# Altium PCB Generic_Axis_Channel_Blade.PcbDoc (part 2 of 3)
Units mm, origin at the board's own origin, x right, y up, seen from the top; angles counter-clockwise.
Board outline 87.5 x 97.62 mm, 4 copper layers (Top Layer 1, L2_GND, L3_PWR, Bottom Layer 1), stack 1.556 mm thick; 166 components, 595 nets, 662 pads, 1674 vias.
Unrouted connection lines stored in the file: 33.
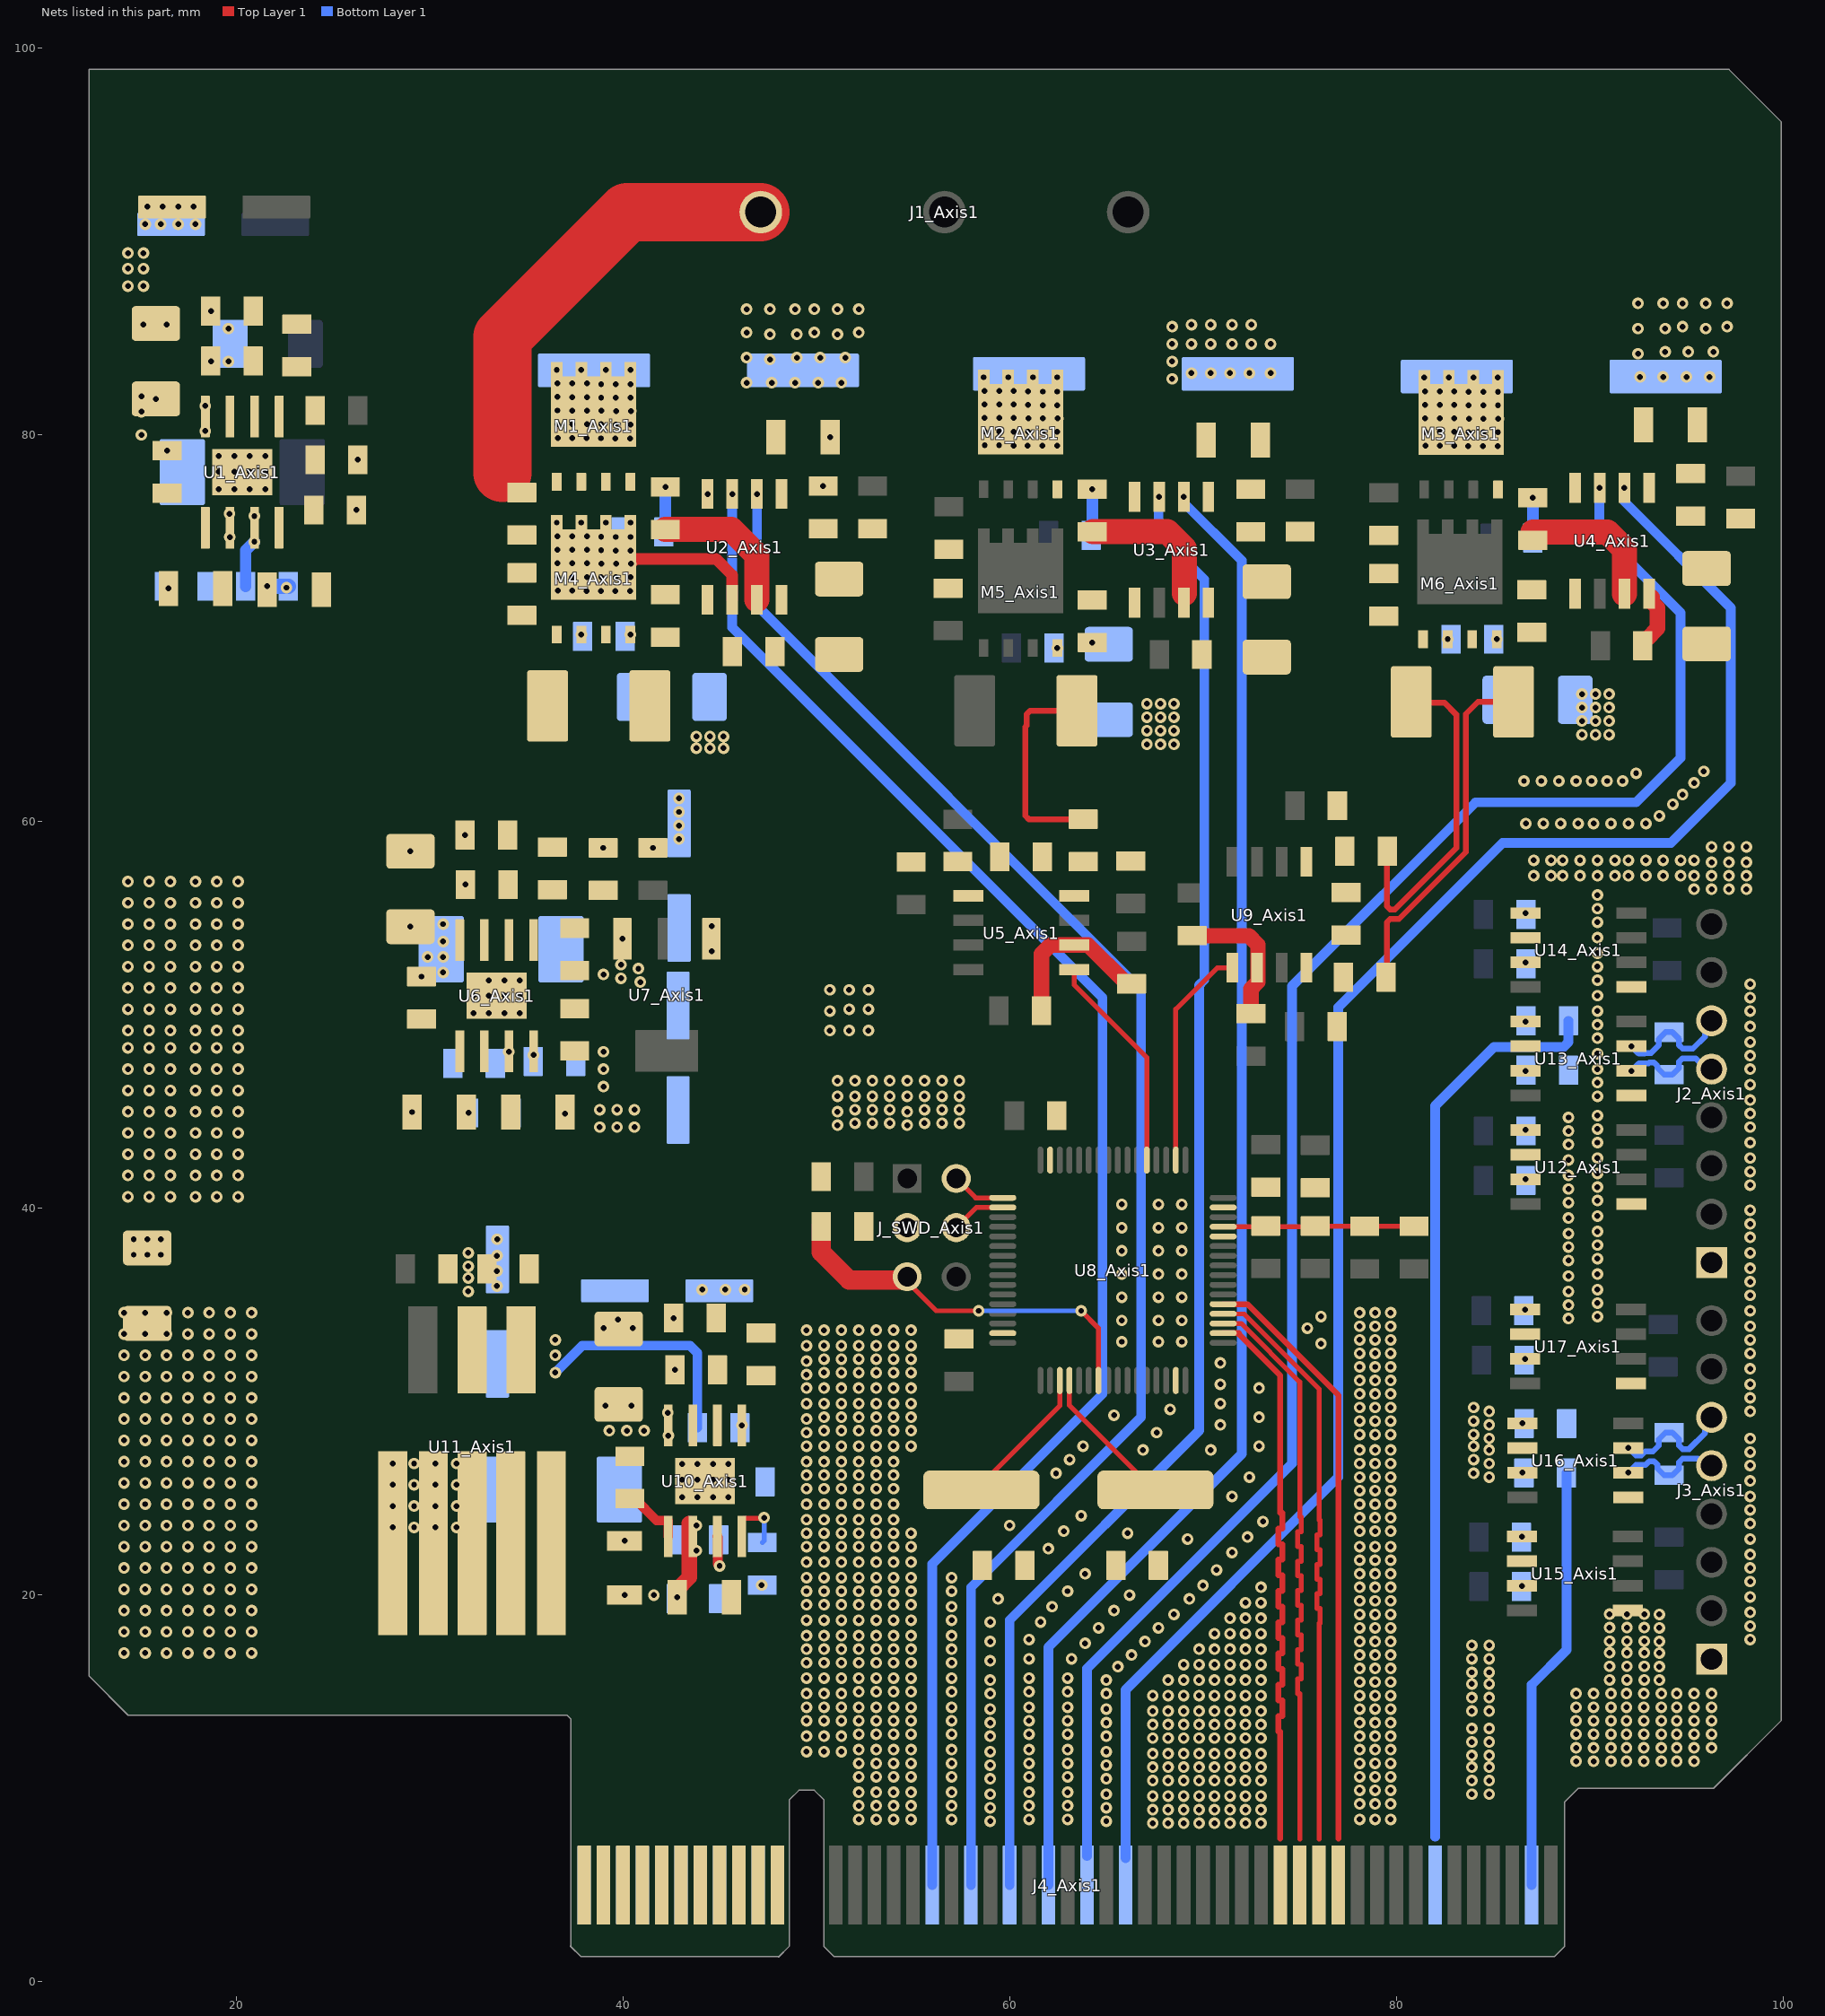
[diagram p4: the nets of this part, all layers, seen from the top]

## Via types
v1: diameter 0.6/0.6 (per signal layer), hole 0.3, Top Layer 1 to Bottom Layer 1, 1674 vias

## Nets (pads, with @x,y where several pads share a name; then routed paths per layer and width w, separated by ;. In a path a pad name is that pad's centre, name@x,y a point inside that pad or via, vN(x,y) a via of type N, cw(c..) or ccw(c..) an arc to the next point about the centre after c; other vN are vias at no path point) (continued)
"AMP1 IN_Axis1_P": C1_Axis1.2 C2_Axis1.2 C3_Axis1.2 C4_Axis1.2 C5_Axis1.2 C6_Axis1.2 C8_Axis1.1 C9_Axis1.1 C10_Axis1.2 C14_Axis1.2 C18_Axis1.2 C19_Axis1.2 C32_Axis1.1 C33_Axis1.1 C34_Axis1.2 C35_Axis1.2 C36_Axis1.1 C37_Axis1.1 C38_Axis1.2 C39_Axis1.2 C48_Axis1.1 C49_Axis1.1 C50_Axis1.2 C51_Axis1.2 C52_Axis1.1 C53_Axis1.1 C54_Axis1.2 C55_Axis1.2 C_BULK1_Axis1.2 C_BULK2_Axis1.2 C_BULK3_Axis1.2 D1_Axis1.1 D2_Axis1.1 D3_Axis1.1 D4_Axis1.1 D5_Axis1.1 D6_Axis1.1 D7_Axis1.1 D8_Axis1.1 J4_Axis1.B1 J4_Axis1.B2 J4_Axis1.B3 J4_Axis1.B4 J4_Axis1.B5 J4_Axis1.B6 J4_Axis1.B7 J4_Axis1.B8 J4_Axis1.B9 J4_Axis1.B10 J4_Axis1.B11 R15_Axis1.1 R16_Axis1.1 R18_Axis1.1 R22_Axis1.1 R23_Axis1.1 R24_Axis1.1 R25_Axis1.1 R30_Axis1.1 R31_Axis1.1 R33_Axis1.1 R34_Axis1.1 R38_Axis1.1 R39_Axis1.1 R41_Axis1.1 U1_Axis1.7 U1_Axis1.9 U2_Axis1.4 U3_Axis1.4 U4_Axis1.4 U6_Axis1.7 U6_Axis1.9 U7_Axis1.1 U10_Axis1.7 U10_Axis1.9 U11_Axis1.2 U11_Axis1.4 | length 29.3
  Top Layer 1 w0.3: R23_Axis1.1@63.484,65.734 61.642,65.734 61.056,65.734 60.88,65.558 60.88,64.972 60.814,64.906 60.814,60.303 60.99,60.128 63.805,60.128 R25_Axis1.1@63.807,60.129 ; R34_Axis1.1@79.468,51.956 79.503,51.991 79.503,54.787 79.679,54.962 80.134,54.962 83.6,58.428 83.6,65.568 84.222,66.19 R24_Axis1.1@86.065,66.19
  other v1: 47.174,20.512 40.086,22.799 28.1,23.5 29.2,23.5 30.3,23.5 31.4,23.5 28.1,24.6 29.2,24.6 30.3,24.6 31.4,24.6 43.059,25.068 43.859,25.068 44.659,25.068 45.459,25.068 28.1,25.7 29.2,25.7 30.3,25.7 31.4,25.7 43.059,25.968 43.859,25.968 44.659,25.968 45.459,25.968 43.059,26.768 43.859,26.768 44.659,26.768 45.459,26.768 28.1,26.8 29.2,26.8 30.3,26.8 31.4,26.8 42.686,31.648 39,33.8 40.5,33.8 39.742,34.254 42.617,34.326 32,35.7 44.1,35.8 45.3,35.8 46.3,35.8 33.484,35.982 32,36.4 33.484,36.764 32,37 33.484,37.546 14.7,37.6 15.4,37.6 16.1,37.6 32,37.7 14.7,38.4 15.4,38.4 16.1,38.4 33.5,38.4 14.4,40.6 15.5,40.6 16.6,40.6 17.9,40.6 19,40.6 20.1,40.6 14.4,41.7 15.5,41.7 16.6,41.7 17.9,41.7 19,41.7 20.1,41.7 14.4,42.8 15.5,42.8 16.6,42.8 17.9,42.8 19,42.8 20.1,42.8 14.4,43.9 15.5,43.9 16.6,43.9 17.9,43.9 19,43.9 20.1,43.9 38.8,44.2 39.7,44.2 40.6,44.2 37,44.9 29.095,44.979 14.4,45 15.5,45 16.6,45 17.9,45 19,45 20.1,45 38.8,45.1 39.7,45.1 40.6,45.1 14.4,46.1 15.5,46.1 16.6,46.1 17.9,46.1 19,46.1 20.1,46.1 39,46.3 14.4,47.2 15.5,47.2 16.6,47.2 17.9,47.2 19,47.2 20.1,47.2 39,47.2 39,48.1 14.4,48.3 15.5,48.3 16.6,48.3 17.9,48.3 19,48.3 20.1,48.3 14.4,49.2 15.5,49.2 16.6,49.2 17.9,49.2 19,49.2 20.1,49.2 50.7,49.2 51.7,49.2 52.7,49.2 32.272,50.097 33.072,50.097 33.872,50.097 34.672,50.097 50.7,50.2 14.4,50.3 15.5,50.3 16.6,50.3 17.9,50.3 19,50.3 20.1,50.3 51.7,50.3 52.7,50.3 32.272,50.997 33.072,50.997 33.872,50.997 34.672,50.997 50.7,51.3 51.7,51.3 52.7,51.3 14.4,51.4 15.5,51.4 16.6,51.4 17.9,51.4 19,51.4 20.1,51.4 33.072,51.797 33.872,51.797 34.672,51.797 14.4,52.5 15.5,52.5 16.6,52.5 17.9,52.5 19,52.5 20.1,52.5 44.6,53.3 14.4,53.6 15.5,53.6 16.6,53.6 17.9,53.6 19,53.6 20.1,53.6 44.6,54.6 14.4,54.7 15.5,54.7 16.6,54.7 17.9,54.7 19,54.7 20.1,54.7 14.4,55.8 15.5,55.8 16.6,55.8 17.9,55.8 19,55.8 20.1,55.8 31.852,56.743 14.4,56.9 15.5,56.9 16.6,56.9 17.9,56.9 19,56.9 20.1,56.9 29.009,58.466 38.982,58.644 41.55,58.644 42.9,59.1 31.84,59.309 42.9,59.8 42.9,60.5 42.9,61.2 43.8,63.8 44.5,63.8 45.2,63.8 67.1,64 67.8,64 68.5,64 43.8,64.4 44.5,64.4 45.2,64.4 89.6,64.5 90.3,64.5 91,64.5 67.1,64.7 67.8,64.7 68.5,64.7 89.6,65.2 90.3,65.2 91,65.2 67.1,65.4 67.8,65.4 68.5,65.4 89.6,65.9 90.3,65.9 91,65.9 67.1,66.1 67.8,66.1 68.5,66.1 89.6,66.6 90.3,66.6 91,66.6 16.503,72.058 26.224,76.117 44.377,76.947 19.1,77.2 19.9,77.2 20.7,77.2 21.5,77.2 50.357,77.349 19.1,78.1 19.9,78.1 20.7,78.1 21.5,78.1 26.284,78.714 19.1,78.9 19.9,78.9 20.7,78.9 21.5,78.9 50.72,79.882 46.4,82.7 47.7,82.7 48.9,82.7 50.1,82.7 51.3,82.7 68.4,82.9 92.6,83 93.8,83 95,83 96.2,83 69.4,83.2 70.4,83.2 71.4,83.2 72.4,83.2 73.5,83.2 18.7,83.8 19.6,83.8 68.4,83.8 47.6,83.9 46.4,84 49,84 50.2,84 51.5,84 92.5,84.2 93.9,84.3 95.1,84.3 96.4,84.3 68.4,84.7 69.4,84.7 70.4,84.7 71.5,84.7 72.5,84.7 73.5,84.7 47.6,85.2 49,85.2 51.1,85.2 46.4,85.3 49.9,85.3 52.2,85.3 19.6,85.5 92.5,85.5 93.9,85.5 96,85.5 68.4,85.6 94.8,85.6 97.1,85.6 15.2,85.7 16.4,85.7 69.4,85.7 70.4,85.7 71.5,85.7 72.5,85.7 18.7,86.4 46.4,86.5 47.6,86.5 48.9,86.5 49.9,86.5 51.1,86.5 52.2,86.5 92.5,86.8 93.8,86.8 94.8,86.8 96,86.8 97.1,86.8 14.4,87.7 15.2,87.7 14.4,88.6 15.2,88.6 14.4,89.4 15.2,89.4 15.3,90.9 16.1,90.9 17,90.9 17.9,90.9 15.4,91.8 16.2,91.8 17,91.8 17.8,91.8
"AMP1 IN_Axis2_N": 
"AMP1 IN_Axis3_N": 
"AMP1 IN_Axis4_N": 
"AMP1 IN_Axis5_N": 
"AMP1 IN_Axis6_N": 
"AMP2 IN_Axis1_N": M6_Axis1.1 M6_Axis1.2 M6_Axis1.3 R14_Axis1.1 R21_Axis1.1 R24_Axis1.2 R35_Axis1.1 | length 17.5
  Top Layer 1 w0.3: R35_Axis1.1@79.538,58.468 79.503,58.433 79.503,55.638 79.679,55.462 79.927,55.462 83.1,58.635 83.1,65.539 82.48,66.159 R24_Axis1.2@80.637,66.159
  other v1: 82.654,69.435
"AMP2 IN_Axis2_N": 
"AMP2 IN_Axis3_N": 
"AMP2 IN_Axis4_N": 
"AMP2 IN_Axis5_N": 
"AMP2 IN_Axis6_N": 
B1_Axis1: C57_Axis1.2 J4_Axis1.A43 R43_Axis1.2 | length 47.2
  Bottom Layer 1 w0.5: 82,7.5 82,45.3 85.046,48.346 88.65,48.346 88.9,48.596 R43_Axis1.2@88.9,49.7
B1_Axis1_N: J2_Axis1.6 R49_Axis1.2 U13_Axis1.7 | length 6.4
  Bottom Layer 1 w0.3: v1(92.154,48.385) 92.541,47.997 92.827,47.997 92.869,48.039 93.18,48.039 93.576,48.435 93.576,48.759 93.926,49.109 R49_Axis1.2@94.1,49.109 94.274,49.109 94.624,48.759 94.624,48.435 94.8,48.259 95.341,48.259 95.957,48.875 95.957,49.004 96.3,49.347 J2_Axis1.6@96.3,49.699
B1_Axis1_P: J2_Axis1.5 R49_Axis1.1 U13_Axis1.6 | length 5.4
  Bottom Layer 1 w0.3: v1(92.154,47.11) 92.541,47.497 93.034,47.497 93.076,47.539 93.324,47.539 93.5,47.364 93.5,47.259 93.85,46.909 R49_Axis1.1@94.1,46.909 94.274,46.909 94.624,47.259 94.624,47.584 94.8,47.759 95.474,47.759 96.034,47.199 J2_Axis1.5@96.3,47.199
B1_Axis2: 
B1_Axis2_N: 
B1_Axis2_P: 
B1_Axis3: 
B1_Axis3_N: 
B1_Axis3_P: 
B1_Axis4: 
B1_Axis4_N: 
B1_Axis4_P: 
B1_Axis5: 
B1_Axis5_N: 
B1_Axis5_P: 
B1_Axis6: 
B1_Axis6_N: 
B1_Axis6_P: 
B2_Axis1: C60_Axis1.2 J4_Axis1.A48 R46_Axis1.2 | length 22.1
  Bottom Layer 1 w0.5: J4_Axis1.A48@87,5 87,15.359 88.8,17.159 C60_Axis1.2@88.8,26.317
B2_Axis1_N: J3_Axis1.6 R52_Axis1.2 U16_Axis1.7 | length 6.6
  Bottom Layer 1 w0.3: v1(91.995,27.609) 92.382,27.221 92.668,27.221 92.869,27.422 93.272,27.422 93.576,27.726 93.576,28.05 93.926,28.4 R52_Axis1.2@94.1,28.4 94.274,28.4 94.624,28.05 94.624,27.726 94.8,27.55 95.14,27.55 95.957,28.367 95.957,28.496 96.3,28.84 J3_Axis1.6@96.3,29.191
B2_Axis1_P: J3_Axis1.5 R52_Axis1.1 U16_Axis1.6 | length 5.7
  Bottom Layer 1 w0.3: v1(91.995,26.334) 92.382,26.721 92.875,26.721 93.076,26.922 93.324,26.922 93.5,26.746 93.5,26.55 93.85,26.2 R52_Axis1.1@94.1,26.2 94.274,26.2 94.624,26.55 94.624,26.874 94.8,27.05 95.59,27.05 95.948,26.691 J3_Axis1.5@96.3,26.691
B2_Axis2: 
B2_Axis2_N: 
B2_Axis2_P: 
B2_Axis3: 
B2_Axis3_N: 
B2_Axis3_P: 
B2_Axis4: 
B2_Axis4_N: 
B2_Axis4_P: 
B2_Axis5: 
B2_Axis5_N: 
B2_Axis5_P: 
B2_Axis6: 
B2_Axis6_N: 
B2_Axis6_P: 
CS_Axis1: J4_Axis1.B35 U8_Axis1.18 | length 30.8
  Top Layer 1 w0.3: U8_Axis1.18@71.043,33.545 71.855,33.545 71.855,33.491 74,31.346 74,24.4 74,24.25 74.103,24.25 74.103,23.442 73.89,23.442 73.89,22.634 74.103,22.634 74.103,21.826 73.89,21.826 73.89,21.018 74.103,21.018 74.103,20.21 73.89,20.21 73.89,19.402 74.103,19.402 74.103,18.594 73.89,18.594 73.89,17.786 74.103,17.786 74.103,16.978 73.89,16.978 73.89,16.17 74.103,16.17 74.103,15.362 73.89,15.362 73.89,14.554 74.103,14.554 74.103,13.746 73.89,13.746 73.89,12.938 74,12.938 74,12.304 74,7.4
CS_Axis2: 
CS_Axis3: 
CS_Axis4: 
CS_Axis5: 
CS_Axis6: 
DGND: C23_Axis1.1 C25_Axis1.1 C28_Axis1.1 C41_Axis1.1 C45_Axis1.1 C46_Axis1.1 C56_Axis1.1 C57_Axis1.1 C58_Axis1.1 C59_Axis1.1 C60_Axis1.1 C61_Axis1.1 J2_Axis1.1 J3_Axis1.1 J_SWD_Axis1.3 U8_Axis1.15 U8_Axis1.31 U8_Axis1.47 U8_Axis1.63 U12_Axis1.2 U12_Axis1.3 U12_Axis1.5 U13_Axis1.2 U13_Axis1.3 U13_Axis1.5 U14_Axis1.2 U14_Axis1.3 U14_Axis1.5 U15_Axis1.2 U15_Axis1.3 U15_Axis1.5 U16_Axis1.2 U16_Axis1.3 U16_Axis1.5 U17_Axis1.2 U17_Axis1.3 U17_Axis1.5
  other v1: 67.4,8.2 68.2,8.2 69,8.2 69.8,8.2 70.6,8.2 71.4,8.2 72.2,8.2 73,8.2 59,8.3 65,8.3 52.2,8.4 53.1,8.4 54,8.4 54.9,8.4 57,8.4 61,8.4 63,8.4 78.1,8.4 78.9,8.4 79.7,8.4 67.4,8.9 68.2,8.9 69,8.9 69.8,8.9 70.6,8.9 71.4,8.9 72.2,8.9 73,8.9 59,9 65,9 52.2,9.1 53.1,9.1 54,9.1 54.9,9.1 57,9.1 61,9.1 63,9.1 78.1,9.2 78.9,9.2 79.7,9.2 67.4,9.6 68.2,9.6 69,9.6 69.8,9.6 70.6,9.6 71.4,9.6 72.2,9.6 73,9.6 59,9.7 65,9.7 83.9,9.7 84.8,9.7 52.2,9.8 53.1,9.8 54,9.8 54.9,9.8 57,9.8 61,9.8 63,9.8 78.1,9.9 78.9,9.9 79.7,9.9 67.4,10.4 68.2,10.4 69,10.4 69.8,10.4 70.6,10.4 71.4,10.4 72.2,10.4 73,10.4 83.9,10.4 84.8,10.4 59,10.5 65,10.5 52.2,10.6 53.1,10.6 54,10.6 54.9,10.6 57,10.6 61,10.6 63,10.6 78.1,10.6 78.9,10.6 79.7,10.6 67.4,11.1 68.2,11.1 69,11.1 69.8,11.1 70.6,11.1 71.4,11.1 72.2,11.1 73,11.1 83.9,11.1 84.8,11.1 59,11.2 65,11.2 52.2,11.3 53.1,11.3 54,11.3 54.9,11.3 57,11.3 61,11.3 63,11.3 78.1,11.3 78.9,11.3 79.7,11.3 89.3,11.4 90.2,11.4 91.1,11.4 91.9,11.4 92.8,11.4 93.7,11.4 94.5,11.4 95.4,11.4 83.9,11.7 84.8,11.7 67.4,11.8 68.2,11.8 69,11.8 69.8,11.8 70.6,11.8 71.4,11.8 72.2,11.8 73,11.8 49.5,11.9 50.4,11.9 51.3,11.9 59,11.9 65,11.9 52.2,12 53.1,12 54,12 54.9,12 57,12 61,12 63,12 78.1,12 78.9,12 79.7,12 89.3,12.1 90.2,12.1 91.1,12.1 91.9,12.1 92.8,12.1 93.7,12.1 94.5,12.1 95.4,12.1 96.3,12.1 83.9,12.4 84.8,12.4 67.4,12.6 68.2,12.6 69,12.6 69.8,12.6 70.6,12.6 71.4,12.6 72.2,12.6 73,12.6 49.5,12.7 50.4,12.7 51.3,12.7 59,12.7 65,12.7 78.1,12.7 78.9,12.7 79.7,12.7 52.2,12.8 53.1,12.8 54,12.8 54.9,12.8 57,12.8 61,12.8 63,12.8 89.3,12.8 90.2,12.8 91.1,12.8 91.9,12.8 92.8,12.8 93.7,12.8 94.5,12.8 95.4,12.8 96.3,12.8 83.9,13.1 84.8,13.1 67.4,13.3 68.2,13.3 69,13.3 69.8,13.3 70.6,13.3 71.4,13.3 72.2,13.3 73,13.3 59,13.4 65,13.4 78.1,13.4 78.9,13.4 79.7,13.4 49.5,13.5 50.4,13.5 51.3,13.5 52.2,13.5 53.1,13.5 54,13.5 54.9,13.5 57,13.5 61,13.5 63,13.5 89.3,13.5 90.2,13.5 91.1,13.5 91.9,13.5 92.8,13.5 93.7,13.5 94.5,13.5 95.4,13.5 96.3,13.5 67.4,14 68.2,14 69,14 69.8,14 70.6,14 71.4,14 72.2,14 73,14 83.9,14 84.8,14 59,14.1 65,14.1 78.1,14.1 78.9,14.1 79.7,14.1 49.5,14.2 50.4,14.2 51.3,14.2 52.2,14.2 53.1,14.2 54,14.2 54.9,14.2 57,14.2 61,14.2 63,14.2 89.3,14.2 90.2,14.2 91.1,14.2 91.9,14.2 92.8,14.2 93.7,14.2 94.5,14.2 95.4,14.2 96.3,14.2 83.9,14.7 84.8,14.7 67.4,14.8 68.2,14.8 69,14.8 69.8,14.8 70.6,14.8 71.4,14.8 72.2,14.8 73,14.8 78.1,14.8 78.9,14.8 79.7,14.8 49.5,14.9 50.4,14.9 51.3,14.9 59,14.9 65,14.9 89.3,14.9 90.2,14.9 91.1,14.9 91.9,14.9 92.8,14.9 93.7,14.9 94.5,14.9 95.4,14.9 96.3,14.9 52.2,15 53.1,15 54,15 54.9,15 57,15 61,15 63,15 83.9,15.4 84.8,15.4 78.1,15.5 78.9,15.5 79.7,15.5 59,15.6 65,15.6 68.2,15.6 69,15.6 69.8,15.6 70.6,15.6 71.4,15.6 72.2,15.6 73,15.6 93.6,15.6 91.024,15.614 91.924,15.614 92.824,15.614 49.5,15.7 50.4,15.7 51.3,15.7 52.2,15.7 53.1,15.7 54,15.7 54.9,15.7 57,15.7 61,15.7 63,15.7 83.9,16 84.8,16 78.1,16.2 78.9,16.2 79.7,16.2 65.6,16.3 91.024,16.314 91.924,16.314 92.824,16.314 93.6,16.3 69,16.4 69.8,16.4 70.6,16.4 71.4,16.4 72.2,16.4 73,16.4 49.5,16.5 50.4,16.5 51.3,16.5 52.2,16.5 53.1,16.5 54,16.5 54.9,16.5 57,16.5 59,16.6 61,16.7 63.2,16.7 83.9,16.7 84.8,16.7 66.3,16.9 78.1,16.9 78.9,16.9 79.7,16.9 93.6,17 91.024,17.014 91.924,17.014 92.824,17.014 49.5,17.2 50.4,17.2 51.3,17.2 52.2,17.2 53.1,17.2 54,17.2 54.9,17.2 57,17.2 69.8,17.2 70.6,17.2 71.4,17.2 72.2,17.2 73,17.2 83.9,17.4 84.8,17.4 63.9,17.5 59,17.6 67,17.6 78.1,17.6 78.9,17.6 79.7,17.6 91.024,17.614 91.924,17.614 92.824,17.614 93.6,17.6 61,17.7 98.3,17.7 49.5,17.9 50.4,17.9 51.3,17.9 52.2,17.9 53.1,17.9 54,17.9 54.9,17.9 57,17.9 70.6,18 71.4,18 72.2,18 73,18 64.6,18.3 67.7,18.3 78.1,18.3 78.9,18.3 79.7,18.3 93.6,18.3 91.024,18.314 91.924,18.314 92.824,18.314 98.3,18.4 59,18.6 61.6,18.6 49.5,18.7 50.4,18.7 51.3,18.7 52.2,18.7 53.1,18.7 54,18.7 54.9,18.7 57,18.7 71.4,18.8 72.2,18.8 73,18.8 68.5,19 78.1,19 78.9,19 79.7,19 93.6,19 91.024,19.014 91.924,19.014 92.824,19.014 98.3,19.1 65.4,19.2 57,19.4 62.2,19.4 49.5,19.5 50.4,19.5 51.3,19.5 52.2,19.5 53.1,19.5 54,19.5 54.9,19.5 72.2,19.6 73,19.6 78.1,19.7 78.9,19.7 79.7,19.7 59.4,19.8 69.3,19.8 98.3,19.9 66.2,20 49.5,20.2 50.4,20.2 51.3,20.2 52.2,20.2 53.1,20.2 54,20.2 54.9,20.2 57,20.2 63,20.2 73,20.4 78.1,20.4 78.9,20.4 79.7,20.4 86.49,20.471 70,20.5 98.3,20.7 49.5,20.9 50.4,20.9 51.3,20.9 52.2,20.9 53.1,20.9 54,20.9 54.9,20.9 57,20.9 63.9,21.1 78.1,21.1 78.9,21.1 79.7,21.1 70.7,21.3 98.3,21.4 49.5,21.7 50.4,21.7 51.3,21.7 52.2,21.7 53.1,21.7 54,21.7 54.9,21.7 78.1,21.8 78.9,21.8 79.7,21.8 98.3,22.1 71.5,22.2 62,22.4 49.5,22.5 50.4,22.5 51.3,22.5 52.2,22.5 53.1,22.5 54,22.5 54.9,22.5 78.1,22.5 78.9,22.5 79.7,22.5 69.2,22.9 98.3,22.9 72.3,23 49.5,23.2 50.4,23.2 51.3,23.2 52.2,23.2 53.1,23.2 54,23.2 54.9,23.2 66.1,23.2 62.8,23.3 78.1,23.3 78.9,23.3 79.7,23.3 60,23.6 98.3,23.7 73.1,23.8 49.5,23.9 50.4,23.9 51.3,23.9 52.2,23.9 53.1,23.9 54,23.9 78.1,24 78.9,24 79.7,24 63.7,24.1 98.3,24.4 49.5,24.7 50.4,24.7 51.3,24.7 52.2,24.7 53.1,24.7 54,24.7 78.1,24.7 78.9,24.7 79.7,24.7 71.5,25.1 98.3,25.1 78.1,25.4 78.9,25.4 79.7,25.4 49.5,25.5 50.4,25.5 51.3,25.5 52.2,25.5 53.1,25.5 54,25.5 98.3,25.9 72.4,26.1 78.1,26.1 78.9,26.1 79.7,26.1 84.8,26.1 49.5,26.2 50.4,26.2 51.3,26.2 52.2,26.2 53.1,26.2 54,26.2 62.4,26.3 84,26.3 86.52,26.334 98.3,26.7 78.1,26.8 78.9,26.8 79.7,26.8 84.8,26.8 49.5,26.9 50.4,26.9 51.3,26.9 52.2,26.9 53.1,26.9 54,26.9 63.1,27 84,27 98.3,27.4 66.9,27.5 70.4,27.5 78.1,27.5 78.9,27.5 79.7,27.5 84.8,27.5 49.5,27.7 50.4,27.7 51.3,27.7 52.2,27.7 53.1,27.7 54,27.7 54.9,27.7 63.8,27.7 72.9,27.7 84,27.7 84.8,28.1 98.3,28.1 78.1,28.3 78.9,28.3 79.7,28.3 84,28.3 49.5,28.4 67.6,28.4 50.4,28.5 51.3,28.5 52.2,28.5 53.1,28.5 54,28.5 54.9,28.5 70.9,28.8 84.8,28.8 78.1,29 78.9,29 79.7,29 84,29 49.5,29.1 50.4,29.2 51.3,29.2 52.2,29.2 53.1,29.2 54,29.2 54.9,29.2 72.9,29.2 65.4,29.3 84.8,29.5 98.3,29.5 68.3,29.6 78.1,29.7 78.9,29.7 79.7,29.7 84,29.7 49.5,29.9 50.4,29.9 51.3,29.9 52.2,29.9 53.1,29.9 54,29.9 54.9,29.9 70.9,29.9 98.3,30.2 78.1,30.4 78.9,30.4 79.7,30.4 49.5,30.7 50.4,30.7 51.3,30.7 52.2,30.7 53.1,30.7 54,30.7 54.9,30.7 72.9,30.7 70.9,30.9 98.3,30.9 78.1,31.1 78.9,31.1 79.7,31.1 49.5,31.4 50.4,31.5 51.3,31.5 52.2,31.5 53.1,31.5 54,31.5 54.9,31.5 98.3,31.7 78.1,31.8 78.9,31.8 79.7,31.8 70.9,32 49.5,32.1 50.4,32.2 51.3,32.2 52.2,32.2 53.1,32.2 54,32.2 54.9,32.2 86.66,32.21 78.1,32.5 78.9,32.5 79.7,32.5 98.3,32.5 49.5,32.9 50.4,32.9 51.3,32.9 52.2,32.9 53.1,32.9 54,32.9 54.9,32.9 76.1,33 65.8,33.1 67.7,33.1 68.9,33.1 78.1,33.2 78.9,33.2 79.7,33.2 98.3,33.2 49.5,33.7 50.4,33.7 51.3,33.7 52.2,33.7 53.1,33.7 54,33.7 54.9,33.7 75.4,33.8 78.1,33.9 78.9,33.9 79.7,33.9 98.3,33.9 65.8,34.2 67.7,34.2 68.9,34.2 88.9,34.3 76.1,34.4 90.4,34.4 78.1,34.6 78.9,34.6 79.7,34.6 98.3,34.7 88.9,35 90.4,35.1 65.8,35.4 67.7,35.4 68.9,35.4 98.3,35.5 88.9,35.7 90.4,35.8 98.3,36.2 88.9,36.5 65.8,36.6 67.7,36.6 68.9,36.6 90.4,36.6 98.3,36.9 88.9,37.3 90.4,37.4 98.3,37.7 65.8,37.8 67.7,37.8 68.9,37.8 88.9,38 90.4,38.1 98.3,38.5 88.9,38.7 90.4,38.8 65.8,39 67.7,39 68.9,39 98.3,39.2 88.9,39.5 90.4,39.6 98.3,39.9 65.8,40.2 67.7,40.2 68.9,40.2 88.9,40.3 90.4,40.4 88.9,41 90.4,41.1 98.3,41.2 86.679,41.502 88.9,41.7 90.4,41.8 98.3,41.9 88.9,42.5 90.4,42.6 98.3,42.6 88.9,43.3 90.4,43.4 98.3,43.4 88.9,44 90.4,44.1 98.3,44.2 51.1,44.3 54.7,44.3 52,44.4 52.9,44.4 53.8,44.4 55.6,44.4 56.5,44.4 57.4,44.4 88.9,44.7 90.4,44.8 98.3,44.9 51.1,45 54.7,45 52,45.1 52.9,45.1 53.8,45.1 55.6,45.1 56.5,45.1 57.4,45.1 98.3,45.6 51.1,45.8 52,45.8 52.9,45.8 53.8,45.8 54.7,45.8 55.6,45.8 56.5,45.8 57.4,45.8 90.4,45.8 98.3,46.4 90.4,46.5 51.1,46.6 52,46.6 52.9,46.6 53.8,46.6 54.7,46.6 55.6,46.6 56.5,46.6 57.4,46.6 86.679,47.11 90.4,47.2 98.3,47.2 98.3,47.9 90.4,48 98.3,48.6 90.4,48.8 98.3,49.4 90.4,49.5 90.4,50.2 98.3,50.2 98.3,50.9 90.4,51 98.3,51.6 90.4,51.8 90.4,52.5 86.679,52.718 90.4,53.2 90.4,54 90.4,54.8 90.4,55.5 90.4,56.2 95.4,56.5 96.3,56.5 97.2,56.5 98.1,56.5 87.1,57.2 88,57.2 88.6,57.2 89.5,57.2 90.4,57.2 91.3,57.2 92,57.2 92.9,57.2 93.8,57.2 94.7,57.2 95.4,57.2 96.3,57.2 97.2,57.2 98.1,57.2 96.3,57.9 97.2,57.9 98.1,57.9 87.1,58 88,58 88.6,58 89.5,58 90.4,58 91.3,58 92,58 92.9,58 93.8,58 94.7,58 95.4,58 96.3,58.7 97.2,58.7 98.1,58.7 86.7,59.9 87.6,59.9 88.5,59.9 89.4,59.9 90.2,59.9 91.1,59.9 92,59.9 92.9,59.9 93.6,60.3 94.3,60.9 94.8,61.4 95.4,62 86.6,62.1 87.5,62.1 88.4,62.1 89.3,62.1 90.1,62.1 90.9,62.1 91.7,62.1 92.4,62.5 95.9,62.6
"MAIN VCC": C8_Axis1.2 C9_Axis1.2 C32_Axis1.2 C33_Axis1.2 C48_Axis1.2 C49_Axis1.2 C_BULK1_Axis1.1 C_BULK2_Axis1.1 C_BULK3_Axis1.1 D7_Axis1.2 J4_Axis1.A1 J4_Axis1.A2 J4_Axis1.A3 J4_Axis1.A4 J4_Axis1.A5 J4_Axis1.A6 J4_Axis1.A7 J4_Axis1.A8 J4_Axis1.A9 J4_Axis1.A10 J4_Axis1.A11 M1_Axis1.5 M1_Axis1.6 M1_Axis1.7 M1_Axis1.8 M2_Axis1.5 M2_Axis1.6 M2_Axis1.7 M2_Axis1.8 M3_Axis1.5 M3_Axis1.6 M3_Axis1.7 M3_Axis1.8 R7_Axis1.2 R27_Axis1.2 R36_Axis1.2 U1_Axis1.2 U6_Axis1.2 U10_Axis1.2 | length 5
  Top Layer 1 w0.8: v1(42.808,19.884) 42.808,20.284 43.439,20.915 U10_Axis1.2@43.439,23.7
  Bottom Layer 1 w0.8: v1@21.8,72.172 R7_Axis1.2@22.69,72.172
  other v1: 14.2,17 15.3,17 16.4,17 17.5,17 18.6,17 19.7,17 20.8,17 14.2,18.1 15.3,18.1 16.4,18.1 17.5,18.1 18.6,18.1 19.7,18.1 20.8,18.1 14.2,19.2 15.3,19.2 16.4,19.2 17.5,19.2 18.6,19.2 19.7,19.2 20.8,19.2 40.086,19.999 41.6,20 14.2,20.3 15.3,20.3 16.4,20.3 17.5,20.3 18.6,20.3 19.7,20.3 20.8,20.3 14.2,21.4 15.3,21.4 16.4,21.4 17.5,21.4 18.6,21.4 19.7,21.4 20.8,21.4 43.8,22.3 14.2,22.5 15.3,22.5 16.4,22.5 17.5,22.5 18.6,22.5 19.7,22.5 20.8,22.5 14.2,23.6 15.3,23.6 16.4,23.6 17.5,23.6 18.6,23.6 19.7,23.6 20.8,23.6 43.8,23.6 14.2,24.7 15.3,24.7 16.4,24.7 17.5,24.7 18.6,24.7 19.7,24.7 20.8,24.7 14.2,25.8 15.3,25.8 16.4,25.8 17.5,25.8 18.6,25.8 19.7,25.8 20.8,25.8 14.2,26.9 15.3,26.9 16.4,26.9 17.5,26.9 18.6,26.9 19.7,26.9 20.8,26.9 14.2,28 15.3,28 16.4,28 17.5,28 18.6,28 19.7,28 20.8,28 14.2,29.1 15.3,29.1 16.4,29.1 17.5,29.1 18.6,29.1 19.7,29.1 20.8,29.1 14.2,30.2 15.3,30.2 16.4,30.2 17.5,30.2 18.6,30.2 19.7,30.2 20.8,30.2 14.2,31.3 15.3,31.3 16.4,31.3 17.5,31.3 18.6,31.3 19.7,31.3 20.8,31.3 14.2,32.4 15.3,32.4 16.4,32.4 17.5,32.4 18.6,32.4 19.7,32.4 20.8,32.4 14.2,33.5 15.3,33.5 16.4,33.5 17.5,33.5 18.6,33.5 19.7,33.5 20.8,33.5 14.2,34.6 15.3,34.6 16.4,34.6 17.5,34.6 18.6,34.6 19.7,34.6 20.8,34.6 32.016,44.935 22.6,72.1 21.611,72.172 19.671,74.713 19.653,75.927 61.69,79.433 62.451,79.433 82.984,79.433 83.72,79.422 84.475,79.416 85.235,79.416 58.712,79.458 59.455,79.458 60.199,79.451 60.936,79.44 81.497,79.44 82.239,79.44 36.633,79.845 37.376,79.845 38.12,79.838 38.857,79.827 39.611,79.82 40.372,79.82 83.738,80.143 84.492,80.136 85.253,80.136 59.456,80.172 60.217,80.172 60.954,80.16 61.708,80.154 62.468,80.154 81.487,80.161 82.241,80.154 83.001,80.154 58.702,80.178 38.874,80.547 39.629,80.54 40.389,80.54 36.623,80.565 37.377,80.558 38.138,80.558 60.972,80.86 61.726,80.854 62.486,80.854 81.487,80.861 82.241,80.854 83.001,80.854 83.756,80.843 84.51,80.836 85.271,80.836 58.702,80.878 59.456,80.872 60.217,80.872 39.647,81.24 40.407,81.24 36.623,81.265 37.377,81.258 38.138,81.258 38.892,81.247 84.493,81.521 85.253,81.521 60.954,81.545 61.708,81.538 62.469,81.538 83.739,81.527 59.456,81.572 60.217,81.572 81.487,81.561 82.241,81.554 83.001,81.554 58.702,81.578 39.629,81.925 40.39,81.925 38.875,81.932 36.623,81.965 37.377,81.958 38.138,81.958 83.739,82.227 84.493,82.221 85.253,82.221 60.954,82.245 61.708,82.238 62.469,82.238 82.241,82.254 83.001,82.254 58.702,82.278 59.456,82.272 60.217,82.272 81.487,82.261 38.875,82.632 39.629,82.625 40.39,82.625 37.377,82.658 38.138,82.658 36.623,82.665 81.442,82.963 82.712,82.963 83.982,82.963 85.252,82.963 58.657,82.981 59.927,82.981 61.197,82.981 62.467,82.981 36.578,83.368 37.848,83.368 39.118,83.368 40.388,83.368
MISO_Axis1: J4_Axis1.B37 U8_Axis1.20 | length 31
  Top Layer 1 w0.254: U8_Axis1.20@71.043,34.545 71.051,34.538 72.124,34.538 76,30.662 76,24 76,23.873 76.055,23.873 76.055,23.111 75.885,23.111 75.885,22.349 76.055,22.349 76.055,21.587 75.885,21.587 75.885,20.825 76.055,20.825 76.055,20.063 75.885,20.063 75.885,19.301 76.055,19.301 76.055,18.539 76,18.539 76,17.651 76,7.377
MISO_Axis2: 
MISO_Axis3: 
MISO_Axis4: 
MISO_Axis5: 
MISO_Axis6: 
MOSI_Axis1: J4_Axis1.B38 U8_Axis1.21 | length 30.8
  Top Layer 1 w0.3: U8_Axis1.21@71.043,35.045 72.292,35.045 77,30.337 77,7.4
MOSI_Axis2: 
MOSI_Axis3: 
MOSI_Axis4: 
MOSI_Axis5: 
MOSI_Axis6: 
NetC1_Axis1_1: C1_Axis1.1 C4_Axis1.1 D9_Axis1.1 FB1_Axis1.1 U2_Axis1.1
NetC1_Axis2_1: 
NetC1_Axis3_1: 
NetC1_Axis4_1: 
NetC1_Axis5_1: 
NetC1_Axis6_1: 
NetC2_Axis1_1: C2_Axis1.1 C5_Axis1.1 D10_Axis1.1 FB2_Axis1.1 U3_Axis1.1
NetC2_Axis2_1: 
NetC2_Axis3_1: 
NetC2_Axis4_1: 
NetC2_Axis5_1: 
NetC2_Axis6_1: 
NetC3_Axis1_1: C3_Axis1.1 C6_Axis1.1 D11_Axis1.1 FB3_Axis1.1 U4_Axis1.1
NetC3_Axis2_1: 
NetC3_Axis3_1: 
NetC3_Axis4_1: 
NetC3_Axis5_1: 
NetC3_Axis6_1: 
NetC7_Axis1_1: C7_Axis1.1 D1_Axis1.2 L1_Axis1.1 U1_Axis1.8
  other v1: 16.427,79.183 15.1,80 18.4,80.2 15.1,81.2 18.4,81.5 15.849,81.864 15.1,82
NetC7_Axis1_2: C7_Axis1.2 U1_Axis1.1
NetC7_Axis2_1: 
NetC7_Axis2_2: 
NetC7_Axis3_1: 
NetC7_Axis3_2: 
NetC7_Axis4_1: 
NetC7_Axis4_2: 
NetC7_Axis5_1: 
NetC7_Axis5_2: 
NetC7_Axis6_1: 
NetC7_Axis6_2: 
NetC11_Axis1_2: C11_Axis1.2 D9_Axis1.2 U2_Axis1.8
NetC11_Axis2_2: 
NetC11_Axis3_2: 
NetC11_Axis4_2: 
NetC11_Axis5_2: 
NetC11_Axis6_2: 
NetC12_Axis1_2: C12_Axis1.2 D10_Axis1.2 U3_Axis1.8
NetC12_Axis2_2: 
NetC12_Axis3_2: 
NetC12_Axis4_2: 
NetC12_Axis5_2: 
NetC12_Axis6_2: 
NetC13_Axis1_2: C13_Axis1.2 D11_Axis1.2 U4_Axis1.8 | length 3
  Top Layer 1 w0.8: C13_Axis1.2@92.746,69.101 92.846,69.451 92.96,69.451 93.506,69.996 93.506,71.06 93.24,71.326 U4_Axis1.8@93.24,71.601
NetC13_Axis2_2: 
NetC13_Axis3_2: 
NetC13_Axis4_2: 
NetC13_Axis5_2: 
NetC13_Axis6_2: 
NetC15_Axis1_2: C15_Axis1.2 R12_Axis1.2
NetC15_Axis2_2: 
NetC15_Axis3_2: 
NetC15_Axis4_2: 
NetC15_Axis5_2: 
NetC15_Axis6_2: 
NetC16_Axis1_2: C16_Axis1.2 R13_Axis1.2
NetC16_Axis2_2: 
NetC16_Axis3_2: 
NetC16_Axis4_2: 
NetC16_Axis5_2: 
NetC16_Axis6_2: 
NetC17_Axis1_2: C17_Axis1.2 R14_Axis1.2
NetC17_Axis2_2: 
NetC17_Axis3_2: 
NetC17_Axis4_2: 
NetC17_Axis5_2: 
NetC17_Axis6_2: 
NetC18_Axis1_1: C18_Axis1.1 R17_Axis1.1 U1_Axis1.6
NetC18_Axis2_1: 
NetC18_Axis3_1: 
NetC18_Axis4_1: 
NetC18_Axis5_1: 
NetC18_Axis6_1: 
NetC19_Axis1_1: C19_Axis1.1 R17_Axis1.2
NetC19_Axis2_1: 
NetC19_Axis3_1: 
NetC19_Axis4_1: 
NetC19_Axis5_1: 
NetC19_Axis6_1: 
NetC20_Axis1_1: C20_Axis1.1 C24_Axis1.2 C26_Axis1.1 C29_Axis1.1 FB6_Axis1.2 U8_Axis1.28 U8_Axis1.29 | length 9.9
  Top Layer 1 w0.254: U8_Axis1.29@71.043,39.045 75.933,39.045 75.964,39.076 C29_Axis1.1@80.915,39.076
NetC20_Axis2_1: 
NetC20_Axis3_1: 
NetC20_Axis4_1: 
NetC20_Axis5_1: 
NetC20_Axis6_1: 
NetC21_Axis1_1: C21_Axis1.1 FB4_Axis1.1 U5_Axis1.6 | length 8.6
  Top Layer 1 w0.8: FB4_Axis1.1@61.648,50.22 61.648,53.152 62.117,53.621 64.046,53.621 65.954,51.713 66.204,51.713 C21_Axis1.1@66.304,51.613
NetC21_Axis2_1: 
NetC21_Axis3_1: 
NetC21_Axis4_1: 
NetC21_Axis5_1: 
NetC21_Axis6_1: 
NetC22_Axis1_1: C22_Axis1.1 C27_Axis1.2 R25_Axis1.2 U5_Axis1.8
NetC22_Axis2_1: 
NetC22_Axis3_1: 
NetC22_Axis4_1: 
NetC22_Axis5_1: 
NetC22_Axis6_1: 
NetC27_Axis1_1: C27_Axis1.1 C30_Axis1.2 R26_Axis1.2 U5_Axis1.1
NetC27_Axis2_1: 
NetC27_Axis3_1: 
NetC27_Axis4_1: 
NetC27_Axis5_1: 
NetC27_Axis6_1: 
NetC31_Axis1_1: C31_Axis1.1 D5_Axis1.2 L2_Axis1.1 U6_Axis1.8
  other v1: 29.586,51.985 30.7,52.2 29.9,53 30.7,53 30.7,53.8 29.009,54.566 30.7,54.7
NetC31_Axis1_2: C31_Axis1.2 U6_Axis1.1
NetC31_Axis2_1: 
NetC31_Axis2_2: 
NetC31_Axis3_1: 
NetC31_Axis3_2: 
NetC31_Axis4_1: 
NetC31_Axis4_2: 
NetC31_Axis5_1: 
NetC31_Axis5_2: 
NetC31_Axis6_1: 
NetC31_Axis6_2: 
NetC34_Axis1_1: C34_Axis1.1 C35_Axis1.1 C36_Axis1.2 L2_Axis1.2 R29_Axis1.1 U7_Axis1.3
  other v1: 40.9,51.7 39.9,51.9 39,52.1 40.8,52.4 39.9,52.6 39.971,53.938
NetC34_Axis2_1: 
NetC34_Axis3_1: 
NetC34_Axis4_1: 
NetC34_Axis5_1: 
NetC34_Axis6_1: 
NetC38_Axis1_1: C38_Axis1.1 R32_Axis1.1 U6_Axis1.6
NetC38_Axis2_1: 
NetC38_Axis3_1: 
NetC38_Axis4_1: 
NetC38_Axis5_1: 
NetC38_Axis6_1: 
NetC39_Axis1_1: C39_Axis1.1 R32_Axis1.2
NetC39_Axis2_1: 
NetC39_Axis3_1: 
NetC39_Axis4_1: 
NetC39_Axis5_1: 
NetC39_Axis6_1: 
NetC40_Axis1_1: C40_Axis1.1 FB5_Axis1.1 U9_Axis1.6 | length 7.3
  Top Layer 1 w0.8: FB5_Axis1.1@69.435,54.102 72.368,54.102 72.836,53.633 72.836,51.704 72.482,51.35 C40_Axis1.1@72.482,50.067
NetC40_Axis2_1: 
NetC40_Axis3_1: 
NetC40_Axis4_1: 
NetC40_Axis5_1: 
NetC40_Axis6_1: 
NetC41_Axis1_2: C41_Axis1.2 J_SWD_Axis1.5 R28_Axis1.1 U8_Axis1.7 | length 20.1
  Top Layer 1 w0.254: J_SWD_Axis1.5@54.699,36.464 54.699,36.201 56.2,34.7 v1(58.4,34.7) ; v1(63.7,34.7) 64.593,33.807 U8_Axis1.7@64.593,31.095
  Top Layer 1 w1: C41_Axis1.2@50.261,39.065 50.261,37.739 51.7,36.3 J_SWD_Axis1.5@54.535,36.3
  Bottom Layer 1 w0.254: v1(58.4,34.7) v1(63.7,34.7)
NetC41_Axis2_2: 
NetC41_Axis3_2: 
NetC41_Axis4_2: 
NetC41_Axis5_2: 
NetC41_Axis6_2: 
NetC42_Axis1_1: C42_Axis1.1 C43_Axis1.2 R34_Axis1.2 U9_Axis1.8
NetC42_Axis2_1: 
NetC42_Axis3_1: 
NetC42_Axis4_1: 
NetC42_Axis5_1: 
NetC42_Axis6_1: 
NetC43_Axis1_1: C43_Axis1.1 C44_Axis1.2 R35_Axis1.2 U9_Axis1.1
NetC43_Axis2_1: 
NetC43_Axis3_1: 
NetC43_Axis4_1: 
NetC43_Axis5_1: 
NetC43_Axis6_1: 
NetC45_Axis1_2: C45_Axis1.2 U8_Axis1.4 Y1_Axis1.1 | length 7
  Top Layer 1 w0.254: U8_Axis1.4@63.093,31.095 63.093,29.807 Y1_Axis1.1@67.152,25.748
NetC45_Axis2_2: 
NetC45_Axis3_2: 
NetC45_Axis4_2: 
NetC45_Axis5_2: 
NetC45_Axis6_2: 
NetC46_Axis1_2: C46_Axis1.2 U8_Axis1.3 Y1_Axis1.2 | length 7
  Top Layer 1 w0.254: Y1_Axis1.2@58.542,25.742 62.6,29.8 U8_Axis1.3@62.6,31.089
NetC46_Axis2_2: 
NetC46_Axis3_2: 
NetC46_Axis4_2: 
NetC46_Axis5_2: 
NetC46_Axis6_2: 
NetC47_Axis1_1: C47_Axis1.1 D6_Axis1.2 L3_Axis1.1 U10_Axis1.8
  other v1: 42.354,28.245 39.3,28.5 40.2,28.5 41.1,28.5 42.321,29.431 39.1,29.8 40.433,29.791
NetC47_Axis1_2: C47_Axis1.2 U10_Axis1.1 | length 3.3
  Top Layer 1 w0.5: C47_Axis1.2@40.363,24.981 40.613,24.981 41.742,23.852 42.319,23.852 42.344,23.827 U10_Axis1.1@42.344,23.027
NetC47_Axis2_1: 
NetC47_Axis2_2: 
NetC47_Axis3_1: 
NetC47_Axis3_2: 
NetC47_Axis4_1: 
NetC47_Axis4_2: 
NetC47_Axis5_1: 
NetC47_Axis5_2: 
NetC47_Axis6_1: 
NetC47_Axis6_2: 
NetC50_Axis1_1: C50_Axis1.1 C51_Axis1.1 C52_Axis1.2 L3_Axis1.2 R37_Axis1.1 U11_Axis1.1 | length 12.2
  Bottom Layer 1 w0.3: R37_Axis1.1@43.849,28.652 R37_Axis1.1@43.849,28.902
  Bottom Layer 1 w0.5: v1(36.5,31.5) 37.9,32.9 43.47,32.9 43.849,32.521 R37_Axis1.1@43.849,28.652
  other v1: 36.5,32.4 36.5,33.2
NetC50_Axis2_1: 
NetC50_Axis3_1: 
NetC50_Axis4_1: 
NetC50_Axis5_1: 
NetC50_Axis6_1: 
NetC54_Axis1_1: C54_Axis1.1 R40_Axis1.1 U10_Axis1.6
NetC54_Axis2_1: 
NetC54_Axis3_1: 
NetC54_Axis4_1: 
NetC54_Axis5_1: 
NetC54_Axis6_1: 
NetC55_Axis1_1: C55_Axis1.1 R40_Axis1.2
NetC55_Axis2_1: 
NetC55_Axis3_1: 
NetC55_Axis4_1: 
NetC55_Axis5_1: 
NetC55_Axis6_1: 
NetD2_Axis1_2: D2_Axis1.2 M4_Axis1.4 R9_Axis1.2 R19_Axis1.2
  other v1: 40.388,69.675
NetD2_Axis2_2: 
NetD2_Axis3_2: 
NetD2_Axis4_2: 
NetD2_Axis5_2: 
NetD2_Axis6_2: 
NetD3_Axis1_2: D3_Axis1.2 M5_Axis1.4 R10_Axis1.2 R20_Axis1.2
  other v1: 62.467,68.979 64.273,69.265
NetD3_Axis2_2: 
NetD3_Axis3_2: 
NetD3_Axis4_2: 
NetD3_Axis5_2: 
NetD3_Axis6_2: 
NetD4_Axis1_2: D4_Axis1.2 M6_Axis1.4 R11_Axis1.2 R21_Axis1.2
  other v1: 85.194,69.435
NetD4_Axis2_2: 
NetD4_Axis3_2: 
NetD4_Axis4_2: 
NetD4_Axis5_2: 
NetD4_Axis6_2: 
NetJ_SWD_Axis1_2: J_SWD_Axis1.2 U8_Axis1.49 | length 2.8
  Top Layer 1 w0.254: J_SWD_Axis1.2@57.239,41.544 58.238,40.545 U8_Axis1.49@59.643,40.545
NetJ_SWD_Axis1_4: J_SWD_Axis1.4 U8_Axis1.50 | length 2.8
  Top Layer 1 w0.254: J_SWD_Axis1.4@57.239,39.004 58.28,40.045 U8_Axis1.50@59.643,40.045
NetJ_SWD_Axis2_2: 
NetJ_SWD_Axis2_4: 
NetJ_SWD_Axis3_2: 
NetJ_SWD_Axis3_4: 
NetJ_SWD_Axis4_2: 
NetJ_SWD_Axis4_4: 
NetJ_SWD_Axis5_2: 
NetJ_SWD_Axis5_4: 
NetJ_SWD_Axis6_2: 
NetJ_SWD_Axis6_4: 
NetM1_Axis1_4: M1_Axis1.4 R1_Axis1.1 R4_Axis1.2 | length 2.4
  Bottom Layer 1 w0.6: R4_Axis1.2@42.12,74.982 42.194,75.056 v1(42.194,77.309)
NetM1_Axis2_4: 
NetM1_Axis3_4: 
NetM1_Axis4_4: 
NetM1_Axis5_4: 
NetM1_Axis6_4: 
NetM2_Axis1_4: M2_Axis1.4 R2_Axis1.1 R5_Axis1.2 | length 2.4
  Bottom Layer 1 w0.6: R5_Axis1.2@64.216,74.807 64.273,74.864 v1(64.273,77.19)
NetM2_Axis2_4: 
NetM2_Axis3_4: 
NetM2_Axis4_4: 
NetM2_Axis5_4: 
NetM2_Axis6_4: 
NetM3_Axis1_4: M3_Axis1.4 R3_Axis1.2 R6_Axis1.2 | length 2.1
  Bottom Layer 1 w0.6: v1(87.058,76.751) 87.058,74.67 R6_Axis1.2@87.059,74.669
NetM3_Axis2_4: 
NetM3_Axis3_4: 
NetM3_Axis4_4: 
NetM3_Axis5_4: 
NetM3_Axis6_4: 
NetM4_Axis1_1: M4_Axis1.1 M4_Axis1.2 M4_Axis1.3 R12_Axis1.1 R19_Axis1.1 R22_Axis1.2
  other v1: 37.848,69.675
NetM4_Axis2_1: 
NetM4_Axis3_1: 
NetM4_Axis4_1: 
NetM4_Axis5_1: 
NetM4_Axis6_1: 
NetR1_Axis1_2: R1_Axis1.2 U2_Axis1.7 | length 7.6
  Top Layer 1 w1.3: R1_Axis1.2@42.194,75.109 45.611,75.109 46.927,73.794 U2_Axis1.7@46.927,71.472
NetR1_Axis2_2: 
NetR1_Axis3_2: 
NetR1_Axis4_2: 
NetR1_Axis5_2: 
NetR1_Axis6_2: 
NetR2_Axis1_2: R2_Axis1.2 U3_Axis1.7 | length 7.4
  Top Layer 1 w1.3: R2_Axis1.2@64.306,74.998 68.154,74.998 69.033,74.119 U3_Axis1.7@69.033,71.798
NetR2_Axis2_2: 
NetR2_Axis3_2: 
NetR2_Axis4_2: 
NetR2_Axis5_2: 
NetR2_Axis6_2: 
NetR3_Axis1_1: R3_Axis1.1 U4_Axis1.7 | length 7.4
  Top Layer 1 w1.3: R3_Axis1.1@87.061,74.982 90.91,74.982 91.789,74.104 U4_Axis1.7@91.789,71.782
NetR3_Axis2_1: 
NetR3_Axis3_1: 
NetR3_Axis4_1: 
NetR3_Axis5_1: 
NetR3_Axis6_1: 
NetR7_Axis1_1: R7_Axis1.1 R15_Axis1.2 U1_Axis1.3 | length 2.5
  Bottom Layer 1 w0.6: R7_Axis1.1@20.49,72.172 20.49,74.022 v1(20.941,74.473)
  other v1: 20.941,75.808
NetR7_Axis2_1: 
NetR7_Axis3_1: 
NetR7_Axis4_1: 
NetR7_Axis5_1: 
NetR7_Axis6_1: 
NetR8_Axis1_2: R8_Axis1.2 R18_Axis1.2 U1_Axis1.5
NetR8_Axis2_2: 
NetR8_Axis3_2: 
NetR8_Axis4_2: 
NetR8_Axis5_2: 
NetR8_Axis6_2: 
NetR9_Axis1_1: R9_Axis1.1 U2_Axis1.5
NetR9_Axis2_1: 
NetR9_Axis3_1: 
NetR9_Axis4_1: 
NetR9_Axis5_1: 
NetR9_Axis6_1: 
NetR10_Axis1_1: R10_Axis1.1 U3_Axis1.5
NetR10_Axis2_1: 
NetR10_Axis3_1: 
NetR10_Axis4_1: 
NetR10_Axis5_1: 
NetR10_Axis6_1: 
NetR11_Axis1_1: R11_Axis1.1 U4_Axis1.5
NetR11_Axis2_1: 
NetR11_Axis3_1: 
NetR11_Axis4_1: 
NetR11_Axis5_1: 
NetR11_Axis6_1: 
NetR16_Axis1_2: R16_Axis1.2 U1_Axis1.4
NetR16_Axis2_2: 
NetR16_Axis3_2: 
NetR16_Axis4_2: 
NetR16_Axis5_2: 
NetR16_Axis6_2: 
NetR27_Axis1_1: R27_Axis1.1 R30_Axis1.2 U6_Axis1.3
  other v1: 34.1,48.1
NetR27_Axis2_1: 
NetR27_Axis3_1: 
NetR27_Axis4_1: 
NetR27_Axis5_1: 
NetR27_Axis6_1: 
NetR29_Axis1_2: R29_Axis1.2 R33_Axis1.2 U6_Axis1.5
NetR29_Axis2_2: 
NetR29_Axis3_2: 
NetR29_Axis4_2: 
NetR29_Axis5_2: 
NetR29_Axis6_2: 
NetR31_Axis1_2: R31_Axis1.2 U6_Axis1.4
  other v1: 35.379,47.928
NetR31_Axis2_2: 
NetR31_Axis3_2: 
NetR31_Axis4_2: 
NetR31_Axis5_2: 
NetR31_Axis6_2: 
NetR36_Axis1_1: R36_Axis1.1 R38_Axis1.2 U10_Axis1.3 | length 1.6
  Top Layer 1 w0.5: U10_Axis1.3@44.884,23.027 44.909,23.002 44.909,21.618 45,21.527 v1(45,21.5)
NetR36_Axis2_1: 
NetR36_Axis3_1: 
NetR36_Axis4_1: 
NetR36_Axis5_1: 
NetR36_Axis6_1: 
NetR37_Axis1_2: R37_Axis1.2 R41_Axis1.2 U10_Axis1.5
  other v1: 46.154,28.777
NetR37_Axis2_2: 
NetR37_Axis3_2: 
NetR37_Axis4_2: 
NetR37_Axis5_2: 
NetR37_Axis6_2: 
NetR39_Axis1_2: R39_Axis1.2 U10_Axis1.4 | length 3.4
  Top Layer 1 w0.254: U10_Axis1.4@46.154,23.027 46.154,23.877 46.252,23.975 47.275,23.975 v1(47.3,24)
  Bottom Layer 1 w0.254: R39_Axis1.2@47.207,22.716 47.3,22.809 v1(47.3,24)
NetR39_Axis2_2: 
NetR39_Axis3_2: 
NetR39_Axis4_2: 
NetR39_Axis5_2: 
NetR39_Axis6_2: 
NetR42_Axis1_1: R42_Axis1.1 U12_Axis1.1
  other v1: 86.679,44.052
NetR42_Axis2_1: 
NetR42_Axis3_1: 
NetR42_Axis4_1: 
NetR42_Axis5_1: 
NetR42_Axis6_1: 
NetR43_Axis1_1: R43_Axis1.1 U13_Axis1.1
  other v1: 86.679,49.66
NetR43_Axis2_1: 
NetR43_Axis3_1: 
NetR43_Axis4_1: 
NetR43_Axis5_1: 
NetR43_Axis6_1: 
NetR44_Axis1_1: R44_Axis1.1 U14_Axis1.1
  other v1: 86.679,55.268
NetR44_Axis2_1: 
NetR44_Axis3_1: 
NetR44_Axis4_1: 
NetR44_Axis5_1: 
NetR44_Axis6_1: 
NetR45_Axis1_1: R45_Axis1.1 U15_Axis1.1
  other v1: 86.49,23.021
NetR45_Axis2_1: 
NetR45_Axis3_1: 
NetR45_Axis4_1: 
NetR45_Axis5_1: 
NetR45_Axis6_1: 
NetR46_Axis1_1: R46_Axis1.1 U16_Axis1.1
  other v1: 86.52,28.884
NetR46_Axis2_1: 
NetR46_Axis3_1: 
NetR46_Axis4_1: 
NetR46_Axis5_1: 
NetR46_Axis6_1: 
NetR47_Axis1_1: R47_Axis1.1 U17_Axis1.1
  other v1: 86.66,34.76
NetR47_Axis2_1: 
NetR47_Axis3_1: 
NetR47_Axis4_1: 
NetR47_Axis5_1: 
NetR47_Axis6_1: 
NetU5_Axis1_5: U5_Axis1.5 U8_Axis1.37 | length 11.4
  Top Layer 1 w0.254: U5_Axis1.5@63.338,52.346 63.338,51.562 67.093,47.807 U8_Axis1.37@67.093,42.495
NetU5_Axis2_5: 
NetU5_Axis3_5: 
NetU5_Axis4_5: 
NetU5_Axis5_5: 
NetU5_Axis6_5: 
NetU8_Axis1_34: U8_Axis1.34 U9_Axis1.5 | length 11.6
  Top Layer 1 w0.254: U8_Axis1.34@68.593,42.495 68.593,50.293 70.748,52.448 U9_Axis1.5@71.517,52.448
NetU8_Axis2_34: 
NetU8_Axis3_34: 
NetU8_Axis4_34: 
NetU8_Axis5_34: 
NetU8_Axis6_34: 
"PWM AH_Axis1": J4_Axis1.A19 U2_Axis1.2 | length 83.8
  Bottom Layer 1 w0.5: v1@46.933,76.947 46.933,71.167 66.8,51.3 66.8,29.2 58,20.4 J4_Axis1.A19@58,5
  other v1: 46.927,76.947
"PWM AH_Axis2": 
"PWM AH_Axis3": 
"PWM AH_Axis4": 
"PWM AH_Axis5": 
"PWM AH_Axis6": 
"PWM AL_Axis1": J4_Axis1.A17 U2_Axis1.3 | length 83.5
  Bottom Layer 1 w0.5: v1@45.653,76.947 45.653,70.047 64.8,50.9 64.8,30.4 56,21.6 J4_Axis1.A17@56,5
  other v1: 45.652,76.947
"PWM AL_Axis2": 
"PWM AL_Axis3": 
"PWM AL_Axis4": 
"PWM AL_Axis5": 
"PWM AL_Axis6": 
"PWM BH_Axis1": J4_Axis1.A23 U3_Axis1.2 | length 77.3
  Bottom Layer 1 w0.5: J4_Axis1.A23@62,5 62,17.3 72,27.3 72,73.5 69,76.5 v1@69,76.9
  other v1: 69.004,76.798
"PWM BH_Axis2": 
"PWM BH_Axis3": 
"PWM BH_Axis4": 
"PWM BH_Axis5": 
"PWM BH_Axis6": 
"PWM BL_Axis1": J4_Axis1.A21 U3_Axis1.3 | length 77
  Bottom Layer 1 w0.5: J4_Axis1.A21@60,5 60,18.7 69.8,28.5 69.8,51.548 70.065,51.813 70.065,72.535 67.7,74.9 v1@67.7,76.9
  other v1: 67.729,76.798
"PWM BL_Axis2": 
"PWM BL_Axis3": 
"PWM BL_Axis4": 
"PWM BL_Axis5": 
"PWM BL_Axis6": 
"PWM CH_Axis1": J4_Axis1.A27 U4_Axis1.2 | length 91.2
  Bottom Layer 1 w0.5: J4_Axis1.A27@66,6.4 66,15.1 77,26.1 77,50.4 85.5,58.9 94.2,58.9 97.3,62 97.3,71.054 91.789,76.566 v1(91.789,77.257)
"PWM CH_Axis2": 
"PWM CH_Axis3": 
"PWM CH_Axis4": 
"PWM CH_Axis5": 
"PWM CH_Axis6": 
"PWM CL_Axis1": J4_Axis1.A25 U4_Axis1.3 | length 90.1
  Bottom Layer 1 w0.5: J4_Axis1.A25@64,6.5 64,16.2 74.6,26.8 74.6,51.5 84.1,61 92.4,61 94.7,63.3 94.7,70.8 90.5,75 v1@90.5,77.257
  other v1: 90.514,77.257
"PWM CL_Axis2": 
"PWM CL_Axis3": 
"PWM CL_Axis4": 
"PWM CL_Axis5": 
"PWM CL_Axis6": 
SCK_Axis1: J4_Axis1.B36 U8_Axis1.19 | length 31
  Top Layer 1 w0.254: U8_Axis1.19@71.043,34.045 71.975,34.045 75,31.02 75,24.166 75,24.039 75.081,24.039 75.081,23.277 74.901,23.277 74.901,22.515 75.081,22.515 75.081,21.753 74.901,21.753 74.901,20.991 75.081,20.991 75.081,20.229 74.901,20.229 74.901,19.467 75.081,19.467 75.081,18.705 74.901,18.705 74.901,17.943 75.081,17.943 75.081,17.181 74.901,17.181 74.901,16.419 75.081,16.419 75.081,15.657 74.901,15.657 74.901,14.895 75,14.895 75,14.3 75,7.377
SCK_Axis2: 
SCK_Axis3: 
SCK_Axis4: 
SCK_Axis5: 
SCK_Axis6: 
Va_Axis1: C11_Axis1.1 C15_Axis1.1 J1_Axis1.1 M1_Axis1.1 M1_Axis1.2 M1_Axis1.3 M4_Axis1.5 M4_Axis1.6 M4_Axis1.7 M4_Axis1.8 R4_Axis1.1 U2_Axis1.6 | length 30
  Top Layer 1 w0.6: v1(40.407,73.338) 40.651,73.582 44.82,73.582 45.652,72.75 U2_Axis1.6@45.652,71.472
  Top Layer 1 w3: 33.769,78.023 33.769,85.069 40.223,91.523 J1_Axis1.1@47.129,91.523
  other v1: 39.611,71.918 40.372,71.918 36.633,71.942 37.376,71.942 38.12,71.935 38.857,71.924 37.377,72.656 38.138,72.656 38.874,72.645 39.629,72.638 40.389,72.638 36.623,72.663 39.647,73.338 36.623,73.363 37.377,73.356 38.138,73.356 38.892,73.345 39.629,74.023 40.39,74.023 38.875,74.029 36.623,74.063 37.377,74.056 38.138,74.056 38.875,74.729 39.629,74.723 40.39,74.723 36.623,74.763 37.377,74.756 38.138,74.756 36.578,75.465 37.848,75.465 39.118,75.465 40.388,75.465
Va_Axis2: 
Va_Axis3: 